# Altium PCB Hall sensor cable.PcbDoc
Units mm, origin at the board's own origin, x right, y up, seen from the top; angles counter-clockwise.
Board outline 4.32 x 164.59 mm, 2 copper layers (Top Layer, Bottom Layer); 16 components, 3 nets, 48 pads, 0 vias.
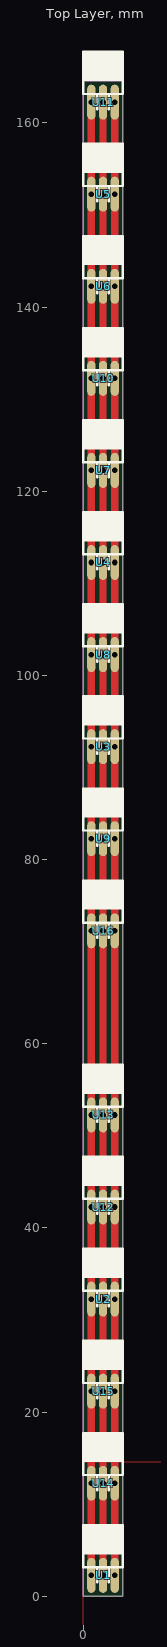
[diagram p0: Top Layer view]
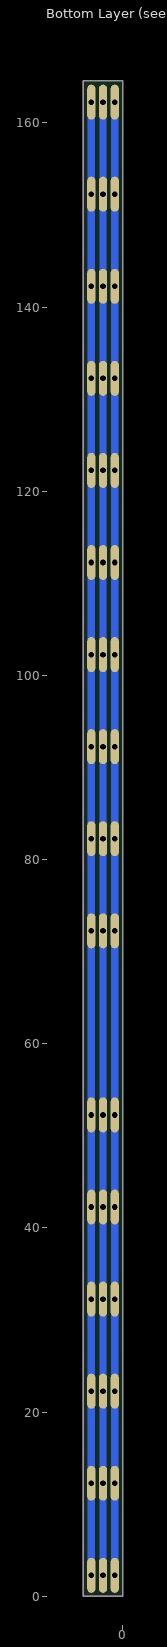
[diagram p1: Bottom Layer view, seen from below]
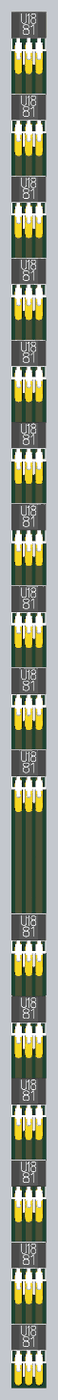
[diagram p2: 3D render of the assembled board from above, using the file's embedded part models]

## Layer stack, top to bottom
Top Solder: solder mask 0.0102, Solder Resist, Dk 3.5
Top Layer: signal copper 0.0356
Dielectric 1: dielectric 0.32, FR-4, Dk 4.8
Bottom Layer: signal copper 0.0356
Bottom Solder: solder mask 0.0102, Solder Resist, Dk 3.5

## Board outline
0,0 0,164.592 4.318,164.592 4.318,0

## Design rules (kind name [scope] priority, off if disabled: settings)
Clearance [All] p1: gap=0.254 ignorepadtopadclearanceinfootprint=FALSE except(0: Arc-Hole Track-Hole SMDPad-Hole THPad-Hole Via-Hole Fill-Hole Poly-Hole Region-Hole Text-Hole)
PlaneClearance [All] p1: clearance=0.408
PlaneConnect [All] p1: planeconnectstyle=Direct reliefexpansion=0.508 reliefentries=4 reliefconductorwidth=0.254 reliefairgap=0.254
PolygonConnect [All] p1: connectstyle=Direct reliefconductorwidth=0.254 reliefentries=4 polygonreliefangle="90 Angle" airgapwidth=0.254
RoutingVias [All] p1: holewidth=0.5 width=1.27 viastyle="Through Hole" minholewidth=0.1 minwidth=0.27 maxholewidth=0.711 maxwidth=1.57
SolderMaskExpansion [All] p1: expansion=0.102 istentingtop=FALSE
Width [All] p1: maxlimit=0.99 minlimit=0.254 preferedwidth=0.4 minimp=50.000000 maximp=50.000000 favimp=50.000000
28 further rules are at their usual default settings.

## Components (designator, comment, footprint, x,y, rotation, side; value= is the part's Value field where it differs from the comment)
U1 "U1881_Hall" U1881 2.159,6.2 r0 top
U2 "U1881_Hall" U1881 2.159,36.2 r0 top
U3 "U1881_Hall" U1881 2.159,96.2 r0 top
U4 "U1881_Hall" U1881 2.159,116.2 r0 top
U5 "U1881_Hall" U1881 2.159,156.2 r0 top
U6 "U1881_Hall" U1881 2.159,146.2 r0 top
U7 "U1881_Hall" U1881 2.159,126.2 r0 top
U8 "U1881_Hall" U1881 2.159,106.2 r0 top
U9 "U1881_Hall" U1881 2.159,86.2 r0 top
U10 "U1881_Hall" U1881 2.159,136.2 r0 top
U11 "U1881_Hall" U1881 2.159,166.2 r0 top
U12 "U1881_Hall" U1881 2.159,46.2 r0 top
U13 "U1881_Hall" U1881 2.159,56.2 r0 top
U14 "U1881_Hall" U1881 2.159,16.2 r0 top
U15 "U1881_Hall" U1881 2.159,26.2 r0 top
U16 "U1881_Hall" U1881 2.159,76.2 r0 top

## Footprints (in the part's own frame and the unit in brackets; to place one, negate y for a bottom-side part, rotate by r counter-clockwise, add the part's x,y. Pads: shape width x height; smd on the part's side, far side on the other; paste and mask are expansions set on the pad)
U1881 [mil]
  oval 35x149.61 hole 24: 1(-50,-155) 2(0,-155) 3(50,-155)
  silkscreen extent -85,-185 85,60, body extent -85,-163 85,63, height 81

## Nets (pads, with @x,y where several pads share a name; then routed paths per layer and width w, separated by ;. In a path a pad name is that pad's centre, name@x,y a point inside that pad or via, vN(x,y) a via of type N, cw(c..) or ccw(c..) an arc to the next point about the centre after c; other vN are vias at no path point)
NetU1_1: U1.1 U2.1 U3.1 U4.1 U5.1 U6.1 U7.1 U8.1 U9.1 U10.1 U11.1 U12.1 U13.1 U14.1 U15.1 U16.1 | length 320
  Top Layer w0.8: U1.1 U14.1 U15.1 U2.1 U12.1 U13.1 U16.1 U9.1 U3.1 U8.1 U4.1 U7.1 U10.1 U6.1 U5.1 U11.1
  Bottom Layer w0.8: U1.1 U14.1 U15.1 U2.1 U12.1 U13.1 U16.1 U9.1 U3.1 U8.1 U4.1 U7.1 U10.1 U6.1 U5.1 U11.1
NetU1_2: U1.2 U2.2 U3.2 U4.2 U5.2 U6.2 U7.2 U8.2 U9.2 U10.2 U11.2 U12.2 U13.2 U14.2 U15.2 U16.2 | length 320
  Top Layer w0.8: U1.2 U14.2 U15.2 U2.2 U12.2 U13.2 U16.2 U9.2 U3.2 U8.2 U4.2 U7.2 U10.2 U6.2 U5.2 U11.2
  Bottom Layer w0.8: U1.2 U14.2 U15.2 U2.2 U12.2 U13.2 U16.2 U9.2 U3.2 U8.2 U4.2 U7.2 U10.2 U6.2 U5.2 U11.2
NetU1_3: U1.3 U2.3 U3.3 U4.3 U5.3 U6.3 U7.3 U8.3 U9.3 U10.3 U11.3 U12.3 U13.3 U14.3 U15.3 U16.3 | length 320
  Top Layer w0.8: U1.3 U14.3 U15.3 U2.3 U12.3 U13.3 U16.3 U9.3 U3.3 U8.3 U4.3 U7.3 U10.3 U6.3 U5.3 U11.3
  Bottom Layer w0.8: U1.3 U14.3 U15.3 U2.3 U12.3 U13.3 U16.3 U9.3 U3.3 U8.3 U4.3 U7.3 U10.3 U6.3 U5.3 U11.3

## Polygon pours and split planes (outlines as drawn)
no net on Top Layer "NONET_L01_P002" (solid, pour order 2): 0,14.571 9,14.571 9,-3.429 0,-3.429 0,14.571 9,14.571 9,-3.429 0,-3.429
no net on Top Layer "NONET_L01_P001" (solid, pour order 1): 0,14.571 9,14.571 9,-3.429 0,-3.429 0,14.571 9,14.571 9,-3.429 0,-3.429

## Keep-outs
Keep-Out Layer:
  the board outline again, w0.1